# Altium PCB Grabber_DIOT.PCBDOC (part 4 of 7)
Units mm, origin at the board's own origin, x right, y up, seen from the top; angles counter-clockwise.
Board outline 221.14 x 100 mm, 4 copper layers (TopLayer, MidLayer1, Internal layer GND, Bottom Layer), stack 1.607 mm thick; 234 components, 170 nets, 1025 pads, 389 vias.
Unrouted connection lines stored in the file: 2.
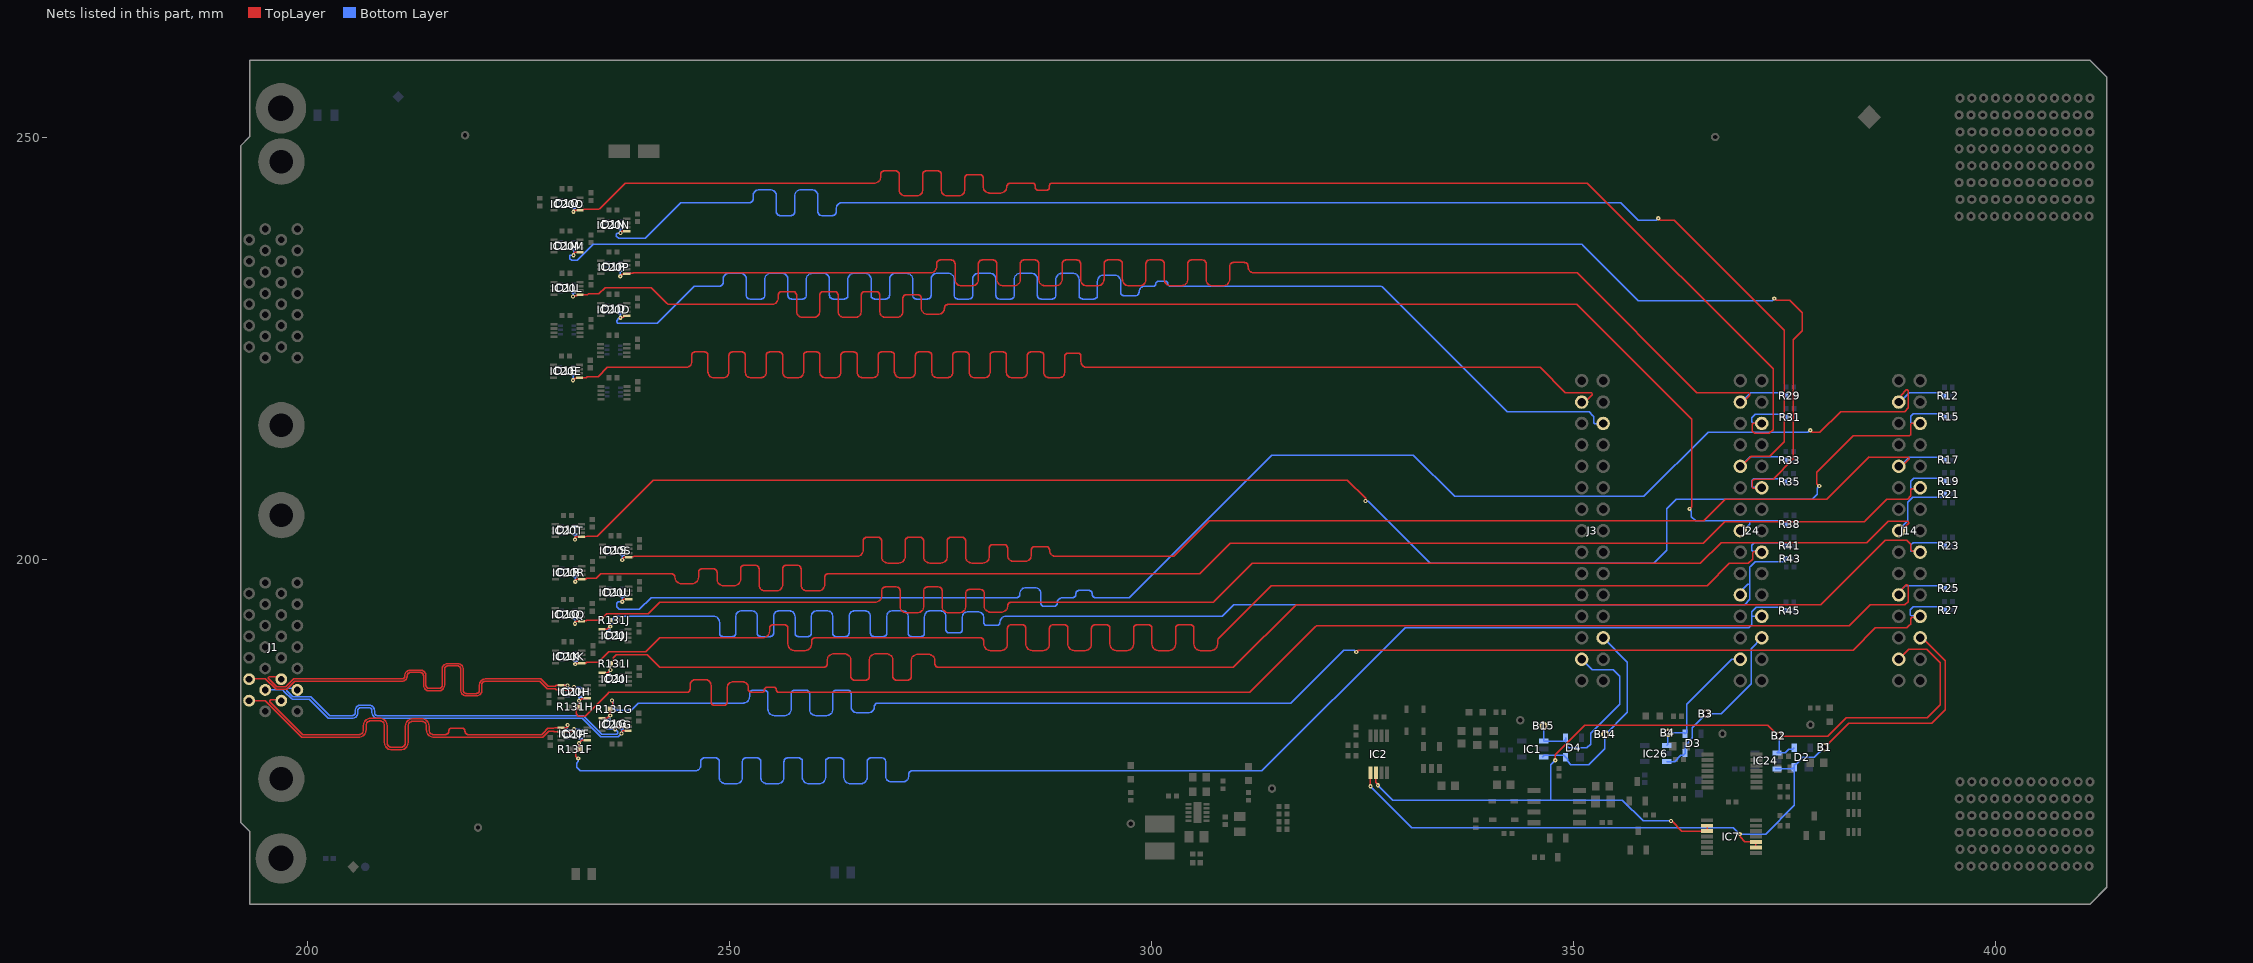
[diagram p5: the nets of this part, all layers, seen from the top]

## Via types
v1: diameter 0.5, hole 0.2, TopLayer to Bottom Layer, tented both sides, 374 vias
v2: diameter 0.8, hole 0.5, TopLayer to Bottom Layer, tented both sides, 15 vias

## Nets (pads, with @x,y where several pads share a name; then routed paths per layer and width w, separated by ;. In a path a pad name is that pad's centre, name@x,y a point inside that pad or via, vN(x,y) a via of type N, cw(c..) or ccw(c..) an arc to the next point about the centre after c; other vN are vias at no path point) (continued)
CC1_N: D1H.6 IC20H.5 J1.4 | length 47.6
  TopLayer w0.152: J1.4@196.921,185.946 196.446,185.946 196.27,186.123 195.487,186.123 195.398,186.034 195.398,185.907 196.414,184.891 197.442,184.891 198.226,185.675 198.39,185.839 207.9,185.839 211.181,185.839 ccw(c211.181,186.225) 211.567,186.225 cw(c212.232,186.225) 212.232,186.89 213.391,186.89 cw(c213.391,186.225) 214.056,186.225 214.056,185.096 ccw(c214.442,185.096) 214.442,184.71 215.601,184.71 ccw(c215.601,185.096) 215.987,185.096 215.987,187 cw(c216.652,187) 216.652,187.665 217.81,187.665 cw(c217.81,187) 218.476,187 218.476,184.499 ccw(c218.862,184.499) 218.862,184.113 220.02,184.113 ccw(c220.02,184.499) 220.406,184.499 220.406,185.173 cw(c221.072,185.173) 221.072,185.839 221.288,185.839 227.673,185.839 227.837,185.675 228.551,184.961 229.37,184.961 229.482,185.074 IC20H.5@230.074,185.074 ; IC20H.5@230.423,185.072 v1(230.834,185.071) v1(230.834,185.071)
  Bottom Layer w0.152: D1H.6@230.834,184.749 v1(230.834,185.071)
CC1_P: D1H.1 IC20H.6 J1.17 | length 50.1
  TopLayer w0.152: J1.17@193.111,185.809 193.194,185.893 195.017,185.893 196.298,184.612 197.558,184.612 198.505,185.559 207.9,185.559 211.181,185.559 ccw(c211.181,186.225) 211.846,186.225 cw(c212.232,186.225) 212.232,186.611 213.391,186.611 cw(c213.391,186.225) 213.777,186.225 213.777,185.096 ccw(c214.442,185.096) 214.442,184.431 215.601,184.431 ccw(c215.601,185.096) 216.266,185.096 216.266,187 cw(c216.652,187) 216.652,187.386 217.81,187.386 cw(c217.81,187) 218.196,187 218.196,184.499 ccw(c218.862,184.499) 218.862,183.834 220.02,183.834 ccw(c220.02,184.499) 220.686,184.499 220.686,185.173 cw(c221.072,185.173) 221.072,185.559 221.288,185.559 227.558,185.559 228.435,184.681 229.393,184.681 229.501,184.574 IC20H.6@230.074,184.574 ; IC20H.6@230.148,184.5 230.423,184.5 230.425,184.497 231.229,184.497 231.544,184.813 231.613,184.813 v1(231.613,184.882)
  Bottom Layer w0.152: v1(231.613,184.882) 232.281,184.882 D1H.1@232.414,184.749
CC2_N: D1G.6 IC20G.5 J1.16 | length 48
  TopLayer w0.152: v1(237.239,179.376) 237.239,179.589 237.341,179.692 IC20G.5@238.016,179.692
  Bottom Layer w0.152: J1.16@195.024,184.547 197.075,184.547 197.274,184.349 197.274,184.335 198.14,183.468 198.195,183.468 198.22,183.443 200.264,183.443 202.51,181.196 205.123,181.196 205.351,181.196 ccw(c205.351,181.836) 205.991,181.836 205.991,182.094 cw(c206.327,182.094) 206.327,182.429 207.332,182.429 cw(c207.332,182.094) 207.668,182.094 207.668,181.836 ccw(c208.308,181.836) 208.308,181.196 210.181,181.196 232.577,181.196 234.674,179.099 234.764,179.01 236.873,179.01 237.256,179.393 D1G.6@237.256,180.017
CC2_P: D1G.1 IC20G.6 J1.3 | length 47.7
  TopLayer w0.152: v1(236.477,179.884) 236.477,179.953 236.716,180.192 IC20G.6@238.016,180.192
  Bottom Layer w0.152: J1.3@198.826,184.676 198.771,184.732 197.643,184.732 197.553,184.643 197.553,184.451 198.256,183.748 200.39,183.748 202.637,181.501 205.123,181.501 205.351,181.501 ccw(c205.351,181.836) 205.686,181.836 205.686,182.094 cw(c206.327,182.094) 206.327,182.734 207.332,182.734 cw(c207.332,182.094) 207.972,182.094 207.972,181.836 ccw(c208.308,181.836) 208.308,181.501 210.181,181.501 232.703,181.501 234.89,179.315 236.678,179.315 236.768,179.404 236.768,179.593 v1(236.477,179.884) 235.809,179.884 D1G.1@235.676,180.017
CC3_N: D1F.6 IC20F.5 J1.2 | length 48.8
  TopLayer w0.152: J1.2@196.921,183.269 196.833,183.358 195.646,183.358 195.557,183.268 195.557,183.142 199.451,179.248 200.043,179.248 205.882,179.248 206.11,179.248 ccw(c206.11,179.795) 206.656,179.795 206.656,180.332 cw(c207.507,180.332) 207.507,181.183 208.599,181.183 cw(c208.599,180.332) 209.45,180.332 209.45,178.294 ccw(c209.996,178.294) 209.996,177.748 211.089,177.748 ccw(c211.089,178.294) 211.635,178.294 211.635,180.272 cw(c212.486,180.272) 212.486,181.123 213.578,181.123 cw(c213.578,180.272) 214.429,180.272 214.429,179.795 ccw(c214.975,179.795) 214.975,179.248 215.978,179.248 216.295,179.248 216.371,179.248 ccw(c216.371,179.635) 216.757,179.635 216.757,179.64 cw(c217.143,179.64) 217.143,180.027 218.302,180.027 cw(c218.302,179.64) 218.688,179.64 218.688,179.635 ccw(c219.074,179.635) 219.074,179.248 223.362,179.248 227.787,179.248 227.956,179.417 227.956,179.429 228.502,179.976 229.231,179.976 229.328,180.074 IC20F.5@230.074,180.074 230.749,180.074 230.851,180.176 v1(230.851,180.39)
  Bottom Layer w0.152: D1F.6@230.834,179.749 230.834,180.373 v1(230.851,180.39)
CC3_P: D1F.1 IC20F.6 J1.15 | length 49.8
  TopLayer w0.152: J1.15@193.116,183.264 195.004,183.264 195.252,183.016 199.324,178.944 205.882,178.944 206.11,178.944 ccw(c206.11,179.795) 206.961,179.795 206.961,180.332 cw(c207.507,180.332) 207.507,180.878 208.599,180.878 cw(c208.599,180.332) 209.145,180.332 209.145,178.294 ccw(c209.996,178.294) 209.996,177.443 211.089,177.443 ccw(c211.089,178.294) 211.939,178.294 211.939,180.272 cw(c212.486,180.272) 212.486,180.819 213.578,180.819 cw(c213.578,180.272) 214.124,180.272 214.124,179.795 ccw(c214.975,179.795) 214.975,178.944 215.978,178.944 227.384,178.944 227.913,178.944 228.26,179.291 228.26,179.303 228.628,179.671 229.197,179.671 229.295,179.574 IC20F.6@230.074,179.574 231.305,179.574 v1(231.613,179.882)
  Bottom Layer w0.152: v1(231.613,179.882) 232.281,179.882 D1F.1@232.414,179.749
EEM0_I2C.SCL: B2.1 D2.3 IC2.2 IC7.9 IC7.10 IC24.1 J14.27 | length 113.6
  TopLayer w0.152: IC2.2@326.632,174.707 326.632,173.576 326.857,173.351 v1(326.857,173.257) ; v1(347.873,176.207) 347.873,176.873 351.343,180.344 373.077,180.344 B2.1@374.31,179.111 ; v1(361.588,169.017) 361.664,169.017 362.873,167.807 IC7.10@365.857,167.807 IC7.9@365.857,168.457 ; B2.1@374.383,179.111 374.423,179.071 380.187,179.071 382.379,181.263 391.958,181.263 393.482,182.787 393.482,187.759 391.883,189.357 389.733,189.357 J14.27@388.575,188.199
  Bottom Layer w0.152: v1(326.857,173.257) 328.632,171.482 347.284,171.482 347.342,171.482 ; v1(347.873,176.207) 347.342,175.676 347.342,171.482 ; v1(361.588,169.017) 358.306,169.017 355.841,171.482 347.342,171.482 ; B2.1@374.383,179.111 374.417,179.077 374.417,177.307 374.194,177.083 IC24.1@374.143,177.083 375.13,177.083 375.542,177.495 375.992,177.495 D2.3@376.192,177.695
EEM0_I2C.SDA: B1.1 D2.2 IC2.1 IC7.2 IC7.3 IC24.3 J14.26 | length 96.3
  TopLayer w0.152: v1(325.982,173.132) IC2.1@325.982,174.707 ; v1(369.732,167.457) 369.768,167.421 369.768,167.121 370.343,166.547 371.618,166.547 IC7.3@371.657,166.507 IC7.2@371.657,165.857 ; B1.1@379.782,177.757 382.63,180.606 392.48,180.606 394.082,182.207 394.082,187.974 391.343,190.713 J14.26@391.115,190.713
  Bottom Layer w0.152: v1(325.982,173.132) 330.882,168.232 368.957,168.232 v1(369.732,167.457) 372.803,167.457 376.192,170.846 D2.2@376.192,175.395 ; IC24.3@373.916,175.182 375.979,175.182 D2.2@376.192,175.395 ; B1.1@379.782,177.757 378.57,176.545 377.187,176.545 376.461,175.819 376.416,175.819 376.192,175.595 D2.2@376.192,175.395
EEM1_I2C.SCL: B4.1 D3.3 IC26.1 J24.27 | length 15.7
  Bottom Layer w0.152: IC26.1@361.092,177.956 361.199,178.063 B4.1@361.199,179.444 363.179,179.444 D3.3@363.256,179.367 363.44,179.551 363.44,182.833 368.776,188.169 369.801,188.169 J24.27@369.805,188.172
EEM1_I2C.SDA: B3.1 D3.2 IC26.3 J24.26 | length 21.1
  Bottom Layer w0.152: IC26.3@361.092,176.056 362.005,176.056 362.741,176.792 363.032,176.792 363.256,177.016 363.256,177.98 364.123,178.847 364.123,180.067 365.721,181.666 B3.1@365.721,181.731 367.519,181.731 371.075,185.287 371.075,189.442 J24.26@372.345,190.712
EEM2_I2C.SCL: B15.1 D4.3 IC1.1 J3.27 | length 23.4
  Bottom Layer w0.152: B15.1@346.483,180.279 346.507,180.256 IC1.1@346.507,178.481 348.883,178.481 D4.3@349.107,178.705 ; D4.3@349.107,178.858 D4.3@349.107,178.705 ; J3.27@351.01,188.172 352.257,186.926 354.745,186.926 355.501,186.17 355.501,182.827 352.055,179.381 352.055,178.125 351.605,177.674 349.477,177.674 349.107,178.044 D4.3@349.107,178.705
EEM2_I2C.SDA: B14.1 D4.2 IC1.3 J3.26 | length 24.3
  Bottom Layer w0.152: IC1.3@346.341,176.581 346.548,176.788 348.883,176.788 349.107,176.564 D4.2@349.107,176.558 349.331,176.335 349.331,176.085 349.72,175.696 351.828,175.696 353.722,177.591 353.722,179.191 356.432,181.9 356.432,187.831 J3.26@353.55,190.712
EEM_IO.LVDS_N0: D1U.6 IC20U.5 J14.3 R12.1 | length 184.3
  TopLayer w0.152: v1(237.324,194.976) 237.324,195.189 237.426,195.292 IC20U.5@238.101,195.292 ; v1(378.077,215.31) 378.096,215.31 378.34,215.066 379.226,215.066 381.678,217.518 389.263,217.518 389.696,217.95 389.696,219.998 389.606,220.087 389.48,220.087 388.852,219.459 388.852,218.93 J14.3@388.575,218.653
  Bottom Layer w0.152: D1U.6@237.341,195.617 237.341,194.993 237.316,194.968 236.827,194.968 236.66,194.8 236.66,194.426 236.673,194.413 236.995,194.091 239.338,194.091 240.733,195.486 283.84,195.486 284.056,195.486 ccw(c284.056,195.872) 284.442,195.872 284.442,195.967 cw(c285.108,195.967) 285.108,196.632 286.266,196.632 cw(c286.266,195.967) 286.932,195.967 286.932,194.821 ccw(c287.318,194.821) 287.318,194.434 288.476,194.434 ccw(c288.476,194.821) 288.862,194.821 cw(c289.527,194.821) 289.527,195.486 290.515,195.486 290.609,195.486 290.686,195.486 ccw(c290.686,195.872) 291.072,195.872 291.072,195.944 cw(c291.458,195.944) 291.458,196.33 292.616,196.33 cw(c292.616,195.944) 293.002,195.944 293.002,195.872 ccw(c293.388,195.872) 293.388,195.486 294.435,195.486 297.392,195.486 314.259,212.354 331.069,212.354 335.954,207.468 358.368,207.468 365.976,215.076 377.814,215.076 378.049,215.31 v1(378.077,215.31) ; J14.3@388.573,218.655 388.707,218.655 389.832,219.78 393.608,219.78 393.744,219.644 393.764,219.644 393.978,219.43 R12.1@393.978,219.41
EEM_IO.LVDS_N1: D1T.6 IC20T.5 J14.6 R15.1 | length 185.5
  TopLayer w0.152: v1(231.714,202.35) 231.714,202.563 231.816,202.666 IC20T.5@232.491,202.666 232.992,202.666 233.09,202.763 234.353,202.763 241,209.41 323.236,209.41 325.4,207.246 v1@325.4,207.092 ; v1(379.147,208.701) 379.147,208.706 378.889,208.964 378.889,210.35 383.171,214.632 389.8,214.632 389.971,214.803 389.971,216.024 390.06,216.113 J14.6@391.115,216.113
  Bottom Layer w0.152: v1(231.714,202.35) 231.731,202.367 D1T.6@231.731,202.991 ; v1@325.518,206.956 325.518,206.936 325.552,206.901 325.744,206.901 332.949,199.696 333.113,199.533 359.554,199.533 361.092,201.071 361.092,203.287 361.092,206.015 362.24,207.163 378.354,207.163 378.436,207.245 378.618,207.426 378.75,207.558 378.914,207.722 378.914,208.438 379.147,208.671 v1(379.147,208.701) ; J14.6@391.107,216.121 390.088,216.121 389.999,216.21 389.999,216.426 389.999,216.949 390.31,217.26 393.638,217.26 393.769,217.129 393.789,217.129 394.005,216.913 R15.1@394.005,216.893
  other v1: 325.392,206.921
EEM_IO.LVDS_N2: D1S.6 IC20S.5 J14.9 R17.1 | length 185.6
  TopLayer w0.152: v1(237.324,199.942) 237.39,200.008 237.39,200.121 237.533,200.264 IC20S.5@238.094,200.264 ; IC20S.5@238.101,200.258 238.171,200.328 238.672,200.328 238.7,200.355 264.899,200.355 265.127,200.355 ccw(c265.127,201.097) 265.869,201.097 265.869,202.187 cw(c266.306,202.187) 266.306,202.624 267.617,202.624 cw(c267.617,202.187) 268.053,202.187 268.053,200.317 ccw(c268.795,200.317) 268.795,199.576 270.106,199.576 ccw(c270.106,200.317) 270.847,200.317 270.847,202.187 cw(c271.284,202.187) 271.284,202.624 272.595,202.624 cw(c272.595,202.187) 273.032,202.187 273.032,200.317 ccw(c273.774,200.317) 273.774,199.576 275.084,199.576 ccw(c275.084,200.317) 275.826,200.317 275.826,202.187 cw(c276.263,202.187) 276.263,202.624 277.573,202.624 cw(c277.573,202.187) 278.01,202.187 278.01,200.317 ccw(c278.752,200.317) 278.752,199.576 280.063,199.576 ccw(c280.063,200.317) 280.804,200.317 280.804,201.328 cw(c281.241,201.328) 281.241,201.765 282.552,201.765 cw(c282.552,201.328) 282.989,201.328 282.989,200.508 ccw(c283.73,200.508) 283.73,199.766 285.041,199.766 ccw(c285.041,200.508) 285.783,200.508 285.783,201.097 cw(c286.22,201.097) 286.22,201.534 287.53,201.534 cw(c287.53,201.097) 287.967,201.097 ccw(c288.709,201.097) 288.709,200.355 291.732,200.355 302.53,200.355 302.656,200.355 306.871,204.57 365.461,204.57 368.046,207.155 380.07,207.155 380.248,207.334 385.064,212.149 385.077,212.137 389.712,212.137 389.801,212.048 389.801,211.921 388.913,211.033 J14.9@388.575,211.033
  Bottom Layer w0.152: v1(237.324,199.942) 237.341,199.959 D1S.6@237.341,200.583 ; J14.9@388.575,211.033 388.734,211.033 389.828,212.127 393.667,212.127 393.771,212.023 393.791,212.023 394.005,211.809 R17.1@394.005,211.789
EEM_IO.LVDS_N3: D1R.6 IC20R.5 J14.12 R19.1 | length 185.7
  TopLayer w0.152: v1(231.749,197.359) 231.749,197.572 231.851,197.675 IC20R.5@232.526,197.675 233.027,197.675 233.125,197.772 234.222,197.772 234.767,198.317 240.976,198.317 243.135,198.317 cw(c243.135,197.88) 243.572,197.88 ccw(c244.314,197.88) 244.314,197.138 245.624,197.138 ccw(c245.624,197.88) 246.366,197.88 246.366,198.469 cw(c246.803,198.469) 246.803,198.906 248.113,198.906 cw(c248.113,198.469) 248.55,198.469 248.55,197.635 ccw(c249.292,197.635) 249.292,196.894 250.603,196.894 ccw(c250.603,197.635) 251.344,197.635 251.344,198.879 cw(c251.781,198.879) 251.781,199.316 253.092,199.316 cw(c253.092,198.879) 253.529,198.879 253.529,197.009 ccw(c254.27,197.009) 254.27,196.268 255.581,196.268 ccw(c255.581,197.009) 256.323,197.009 256.323,198.879 cw(c256.76,198.879) 256.76,199.316 258.07,199.316 cw(c258.07,198.879) 258.507,198.879 258.507,197.009 ccw(c259.249,197.009) 259.249,196.268 260.559,196.268 ccw(c260.559,197.009) 261.301,197.009 261.301,197.88 cw(c261.738,197.88) 261.738,198.317 261.967,198.317 305.746,198.317 309.37,201.94 365.394,201.94 367.944,204.49 384.529,204.49 384.618,204.58 387.164,207.125 389.615,207.125 390.023,207.534 390.023,208.243 390.137,208.357 J14.12@390.709,208.357
  Bottom Layer w0.152: v1(231.749,197.359) 231.766,197.376 D1R.6@231.766,198 ; J14.12@391.282,208.357 390.137,208.357 389.971,208.523 389.971,208.838 389.971,209.246 390.358,209.633 393.637,209.633 393.771,209.499 393.791,209.499 394.005,209.285 R19.1@394.005,209.265
EEM_IO.LVDS_N4: D1Q.6 IC20Q.5 J14.15 R21.1 | length 188.2
  TopLayer w0.152: v1(231.714,192.376) 231.714,192.589 231.816,192.692 IC20Q.5@232.491,192.692 232.54,192.741 233.041,192.741 233.089,192.789 234.73,192.789 235.506,193.565 240.417,193.565 240.596,193.743 241.79,194.937 267.097,194.937 267.326,194.937 ccw(c267.326,195.679) 268.068,195.679 268.068,196.304 cw(c268.504,196.304) 268.504,196.741 269.815,196.741 cw(c269.815,196.304) 270.252,196.304 270.252,194.434 ccw(c270.994,194.434) 270.994,193.693 272.304,193.693 ccw(c272.304,194.434) 273.046,194.434 273.046,196.304 cw(c273.483,196.304) 273.483,196.741 274.793,196.741 cw(c274.793,196.304) 275.23,196.304 275.23,194.434 ccw(c275.972,194.434) 275.972,193.693 277.283,193.693 ccw(c277.283,194.434) 278.024,194.434 278.024,196.007 cw(c278.461,196.007) 278.461,196.444 279.772,196.444 cw(c279.772,196.007) 280.209,196.007 280.209,194.5 ccw(c280.95,194.5) 280.95,193.759 282.261,193.759 ccw(c282.261,194.5) 283.003,194.5 cw(c283.44,194.5) 283.44,194.937 285.204,194.937 307.393,194.937 307.482,195.027 311.988,199.533 365.084,199.533 367.536,201.985 384.794,201.985 387.333,204.524 389.673,204.524 389.763,204.435 389.763,204.309 388.867,203.413 J14.15@388.575,203.413
  Bottom Layer w0.152: v1(231.714,192.376) 231.731,192.393 D1Q.6@231.731,193.017 ; J14.15@388.575,203.413 388.575,203.498 389.664,204.587 389.664,206.795 390.238,207.37 393.683,207.37 393.796,207.483 393.809,207.483 394.005,207.679 R21.1@394.005,207.692
EEM_IO.LVDS_N5: D1I.3 IC20I.1 J14.18 R23.1 R131I.1 | length 184.2
  TopLayer w0.152: IC20I.1@234.951,186.585 235.601,186.585 v1(235.926,186.91) 235.926,187.655 236.14,187.868 236.154,187.868 236.244,187.958 236.244,188.365 236.615,188.736 240.256,188.736 240.345,188.647 240.533,188.46 241.769,187.223 260.947,187.223 261.176,187.223 ccw(c261.176,187.66) 261.613,187.66 261.613,188.067 cw(c262.355,188.067) 262.355,188.809 263.665,188.809 cw(c263.665,188.067) 264.407,188.067 264.407,186.136 ccw(c264.844,186.136) 264.844,185.699 266.154,185.699 ccw(c266.154,186.136) 266.591,186.136 266.591,188.067 cw(c267.333,188.067) 267.333,188.809 268.644,188.809 cw(c268.644,188.067) 269.385,188.067 269.385,186.136 ccw(c269.822,186.136) 269.822,185.699 271.133,185.699 ccw(c271.133,186.136) 271.57,186.136 271.57,188.008 cw(c272.311,188.008) 272.311,188.75 273.622,188.75 cw(c273.622,188.008) 274.364,188.008 274.364,187.66 ccw(c274.801,187.66) 274.801,187.223 276.231,187.223 309.748,187.223 317.18,194.655 379.362,194.655 386.967,202.26 389.539,202.26 389.909,201.891 389.998,201.801 389.998,201.131 390.175,200.954 391.034,200.954 J14.18@391.115,200.873
  Bottom Layer w0.152: D1I.3@235.711,186.41 235.711,186.695 v1(235.926,186.91) ; J14.18@390.516,200.803 390.516,200.876 390.446,200.946 390.086,200.946 389.997,201.036 389.997,201.722 390.272,201.997 393.641,201.997 393.771,201.867 393.791,201.867 394.005,201.653 R23.1@394.005,201.633
EEM_IO.LVDS_N6: D1H.3 IC20H.1 J14.21 R25.1 R131H.1 | length 184.5
  TopLayer w0.152: IC20H.1@233.174,183.574 233.1,183.5 232.544,183.5 232.293,183.249 v1(232.199,183.249) 232.199,182.504 231.845,182.149 231.845,181.71 232.114,181.441 232.931,181.441 235.575,184.085 235.739,184.249 244.751,184.249 244.967,184.249 ccw(c244.967,184.635) 245.353,184.635 245.353,185.107 cw(c246.018,185.107) 246.018,185.773 247.177,185.773 cw(c247.177,185.107) 247.842,185.107 247.842,183.111 ccw(c248.228,183.111) 248.228,182.725 249.386,182.725 ccw(c249.386,183.111) 249.772,183.111 249.772,184.827 cw(c250.438,184.827) 250.438,185.492 251.596,185.492 cw(c251.596,184.827) 252.262,184.827 252.262,184.635 ccw(c252.648,184.635) 252.648,184.249 253.709,184.249 253.813,184.249 253.889,184.249 ccw(c253.889,184.533) 254.173,184.533 254.173,184.564 cw(c254.458,184.564) 254.458,184.849 255.311,184.849 cw(c255.311,184.564) 255.596,184.564 255.596,184.533 ccw(c255.88,184.533) 255.88,184.249 256.387,184.249 311.691,184.249 319.442,192 319.606,192.164 382.725,192.164 385.191,194.63 389.312,194.63 389.689,195.007 389.689,196.939 389.599,197.029 389.473,197.029 J14.21@388.575,196.13 ; J14.21@388.575,195.819 J14.21@388.778,195.615
  Bottom Layer w0.152: v1(232.199,183.249) 232.207,183.256 232.207,183.675 232.28,183.748 D1H.3@232.414,183.749 ; J14.21@388.575,195.793 388.575,196.103 389.359,196.887 393.676,196.887 393.769,196.794 393.789,196.794 394.003,196.58 R25.1@394.003,196.56
EEM_IO.LVDS_N7: D1G.3 IC20G.1 J14.24 R27.1 R131G.1 | length 185
  TopLayer w0.152: IC20G.1@234.916,181.192 235.566,181.192 v1(235.891,181.517) 235.891,182.262 236.227,182.597 236.227,183.07 236.111,183.186 v1(236.111,183.28) ; v1@236.105,183.273 v1(236.111,183.28) ; v1@236.178,183.346 v1(236.111,183.28) ; v1(324.286,189.031) 324.515,189.26 383.182,189.26 385.819,191.898 389.545,191.898 389.596,191.949 389.83,192.182 389.993,192.346 389.993,193 390.124,193.131 390.992,193.131 J14.24@391.115,193.253
  Bottom Layer w0.152: D1G.3@235.676,181.017 235.676,181.302 v1(235.891,181.517) ; v1(236.111,183.28) 236.111,183.186 236.241,183.056 236.241,183.037 236.262,183.016 236.262,182.448 236.594,182.116 238.376,182.116 238.458,182.198 239.248,182.989 251.474,182.989 251.69,182.989 ccw(c251.69,183.705) 252.407,183.705 252.407,184.076 cw(c252.843,184.076) 252.843,184.513 254.154,184.513 cw(c254.154,184.076) 254.591,184.076 254.591,182.219 ccw(c255.307,182.219) 255.307,181.503 256.618,181.503 ccw(c256.618,182.219) 257.334,182.219 257.334,184.076 cw(c257.771,184.076) 257.771,184.513 259.082,184.513 cw(c259.082,184.076) 259.519,184.076 259.519,182.219 ccw(c260.235,182.219) 260.235,181.503 261.545,181.503 ccw(c261.545,182.219) 262.262,182.219 262.262,184.074 cw(c262.699,184.074) 262.699,184.511 264.009,184.511 cw(c264.009,184.074) 264.446,184.074 264.446,182.552 ccw(c265.162,182.552) 265.162,181.835 266.473,181.835 ccw(c266.473,182.552) 267.189,182.552 cw(c267.626,182.552) 267.626,182.989 268.936,182.989 316.526,182.989 322.798,189.26 324.056,189.26 v1(324.286,189.031) ; J14.24@391.115,193.253 391.06,193.308 390.042,193.308 389.952,193.397 389.952,194.056 390.282,194.386 393.627,194.386 393.769,194.244 393.789,194.244 394.003,194.03 R27.1@394.003,194.01
EEM_IO.LVDS_N8: D1P.6 IC20P.5 J24.3 R29.1 | length 185.3
  TopLayer w0.152: v1(237.089,233.565) 237.124,233.565 237.352,233.793 237.792,233.793 237.887,233.887 238.581,233.887 238.653,233.96 273.613,233.96 273.837,233.96 ccw(c273.837,234.692) 274.569,234.692 274.569,235.047 cw(c275.006,235.047) 275.006,235.484 276.317,235.484 cw(c276.317,235.047) 276.753,235.047 276.753,233.168 ccw(c277.486,233.168) 277.486,232.436 278.797,232.436 ccw(c278.797,233.168) 279.529,233.168 279.529,235.047 cw(c279.966,235.047) 279.966,235.484 281.277,235.484 cw(c281.277,235.047) 281.713,235.047 281.713,233.168 ccw(c282.446,233.168) 282.446,232.436 283.757,232.436 ccw(c283.757,233.168) 284.489,233.168 284.489,235.047 cw(c284.926,235.047) 284.926,235.484 286.237,235.484 cw(c286.237,235.047) 286.673,235.047 286.673,233.168 ccw(c287.406,233.168) 287.406,232.436 288.717,232.436 ccw(c288.717,233.168) 289.449,233.168 289.449,235.047 cw(c289.886,235.047) 289.886,235.484 291.197,235.484 cw(c291.197,235.047) 291.633,235.047 291.633,233.168 ccw(c292.366,233.168) 292.366,232.436 293.677,232.436 ccw(c293.677,233.168) 294.409,233.168 294.409,235.047 cw(c294.846,235.047) 294.846,235.484 296.157,235.484 cw(c296.157,235.047) 296.593,235.047 296.593,233.168 ccw(c297.326,233.168) 297.326,232.436 298.637,232.436 ccw(c298.637,233.168) 299.369,233.168 299.369,235.047 cw(c299.806,235.047) 299.806,235.484 301.117,235.484 cw(c301.117,235.047) 301.553,235.047 301.553,233.168 ccw(c302.286,233.168) 302.286,232.436 303.597,232.436 ccw(c303.597,233.168) 304.329,233.168 304.329,235.047 cw(c304.766,235.047) 304.766,235.484 306.077,235.484 cw(c306.077,235.047) 306.513,235.047 306.513,233.168 ccw(c307.246,233.168) 307.246,232.436 308.557,232.436 ccw(c308.557,233.168) 309.289,233.168 309.289,234.752 cw(c309.726,234.752) 309.726,235.189 311.037,235.189 cw(c311.037,234.752) 311.473,234.752 311.473,234.692 ccw(c312.206,234.692) 312.206,233.96 314.696,233.96 350.456,233.96 364.659,219.757 370.818,219.757 370.907,219.668 370.907,219.457 370.103,218.652 J24.3@369.805,218.652
  Bottom Layer w0.152: v1@237.103,233.565 237.106,233.568 D1P.6@237.106,234.192 ; J24.3@369.805,218.652 369.937,218.652 371.057,219.773 374.845,219.773 374.964,219.654 374.984,219.654 375.198,219.44 R29.1@375.198,219.42
EEM_IO.LVDS_N9: D1O.6 IC20O.5 J24.6 R31.1 | length 185.4
  TopLayer w0.152: v1(231.531,241.192) 231.531,241.241 231.656,241.367 IC20O.5@232.331,241.367 232.405,241.44 232.742,241.44 232.769,241.467 234.54,241.467 234.63,241.556 237.667,244.594 266.983,244.594 267.212,244.594 ccw(c267.212,245.335) 267.953,245.335 267.953,245.608 cw(c268.39,245.608) 268.39,246.045 269.701,246.045 cw(c269.701,245.608) 270.138,245.608 270.138,243.811 ccw(c270.88,243.811) 270.88,243.07 272.19,243.07 ccw(c272.19,243.811) 272.932,243.811 272.932,245.608 cw(c273.369,245.608) 273.369,246.045 274.679,246.045 cw(c274.679,245.608) 275.116,245.608 275.116,243.811 ccw(c275.858,243.811) 275.858,243.07 277.169,243.07 ccw(c277.169,243.811) 277.91,243.811 277.91,245.166 cw(c278.347,245.166) 278.347,245.603 279.658,245.603 cw(c279.658,245.166) 280.095,245.166 280.095,244.157 ccw(c280.836,244.157) 280.836,243.415 282.147,243.415 ccw(c282.147,244.157) 282.889,244.157 cw(c283.326,244.157) 283.326,244.594 284.171,244.594 284.177,244.594 285.929,244.594 cw(c285.929,244.258) 286.265,244.258 286.265,244.081 ccw(c286.6,244.081) 286.6,243.746 287.606,243.746 ccw(c287.606,244.081) 287.941,244.081 287.941,244.258 cw(c288.276,244.258) 288.276,244.594 290.545,244.594 351.673,244.594 373.69,222.577 373.69,215.377 373.25,214.937 371.489,214.937 371.237,215.189 371.237,216.023 371.326,216.112 J24.6@372.345,216.112
  Bottom Layer w0.152: v1(231.531,241.192) 231.531,241.108 231.571,241.068 D1O.6@231.571,241.692 ; J24.6@372.345,216.112 371.328,216.112 371.147,216.293 371.147,216.785 371.564,217.202 374.894,217.202 374.986,217.11 375.006,217.11 375.22,216.897 R31.1@375.22,216.877
EEM_IO.LVDS_N10: D1N.6 IC20N.5 J24.9 R33.1 | length 184.1
  TopLayer w0.152: v1(237.116,238.69) 237.116,238.791 237.191,238.867 IC20N.5@237.866,238.867 ; v1(360.081,240.434) 360.123,240.434 360.344,240.213 361.982,240.213 375.012,227.182 375.012,213.956 373.287,212.231 371.102,212.231 369.904,211.032 J24.9@369.805,211.032
  Bottom Layer w0.152: D1N.6@237.106,239.192 237.106,238.773 v1@237.116,238.763 ; v1(237.116,238.69) 237.105,238.679 236.754,238.679 236.637,238.562 236.637,238.301 236.904,238.034 240.024,238.034 241.333,239.343 244.186,242.196 244.268,242.278 252.18,242.278 252.396,242.278 ccw(c252.396,242.715) 252.833,242.715 252.833,243.086 cw(c253.549,243.086) 253.549,243.802 254.86,243.802 cw(c254.86,243.086) 255.576,243.086 255.576,241.191 ccw(c256.013,241.191) 256.013,240.754 257.324,240.754 ccw(c257.324,241.191) 257.76,241.191 257.76,243.086 cw(c258.477,243.086) 258.477,243.802 259.787,243.802 cw(c259.787,243.086) 260.504,243.086 260.504,241.191 ccw(c260.941,241.191) 260.941,240.754 262.251,240.754 ccw(c262.251,241.191) 262.688,241.191 262.688,241.562 cw(c263.404,241.562) 263.404,242.278 264.907,242.278 355.665,242.278 357.732,240.21 359.817,240.21 359.947,240.34 360.037,240.34 v1@360.04,240.337 ; J24.9@369.805,211.032 370.959,212.187 374.789,212.187 374.953,212.023 374.973,212.023 375.187,211.809 R33.1@375.187,211.789
EEM_IO.LVDS_N11: D1M.6 IC20M.5 J24.12 R35.1 | length 184.8
  TopLayer w0.152: v1(231.554,236.058) 231.554,236.271 231.656,236.374 IC20M.5@232.331,236.374 ; J24.12@372.345,208.492 372.295,208.443 371.305,208.443 371.216,208.532 371.216,208.918 371.216,209.303 371.439,209.526 373.681,209.526 376.061,211.907 376.061,226.014 377.145,227.098 377.145,229.235 375.689,230.691 374.041,230.691 v1(373.824,230.909)
  Bottom Layer w0.152: v1(231.554,236.058) 231.55,236.062 231.178,236.062 231.089,235.972 231.089,235.655 231.319,235.424 231.973,235.424 233.876,237.328 351.048,237.328 351.13,237.246 351.256,237.12 357.714,230.661 373.561,230.661 373.808,230.909 v1(373.824,230.909) ; v1@231.571,236.075 D1M.6@231.571,236.699 ; J24.12@372.345,208.492 372.255,208.582 371.257,208.582 371.152,208.687 371.152,209.332 371.392,209.572 374.818,209.572 374.94,209.45 374.96,209.45 375.174,209.236 R35.1@375.174,209.216
EEM_IO.LVDS_N12: D1L.6 IC20L.5 J24.15 R38.1 | length 183.5
  TopLayer w0.152: v1(231.493,231.158) 231.559,231.225 231.914,231.225 231.982,231.293 232.257,231.293 IC20L.5@232.331,231.367 ; IC20L.5@232.552,231.39 233.246,231.39 233.318,231.462 234.548,231.462 235.3,232.214 240.766,232.214 242.601,230.379 242.765,230.215 254.86,230.215 255.076,230.215 ccw(c255.076,230.932) 255.792,230.932 255.792,231.303 cw(c256.229,231.303) 256.229,231.739 257.539,231.739 cw(c257.539,231.303) 257.976,231.303 257.976,229.408 ccw(c258.693,229.408) 258.693,228.691 260.003,228.691 ccw(c260.003,229.408) 260.72,229.408 260.72,231.303 cw(c261.156,231.303) 261.156,231.739 262.467,231.739 cw(c262.467,231.303) 262.904,231.303 262.904,229.408 ccw(c263.62,229.408) 263.62,228.691 264.931,228.691 ccw(c264.931,229.408) 265.647,229.408 265.647,231.303 cw(c266.084,231.303) 266.084,231.739 267.395,231.739 cw(c267.395,231.303) 267.832,231.303 267.832,229.408 ccw(c268.548,229.408) 268.548,228.691 269.858,228.691 ccw(c269.858,229.408) 270.575,229.408 270.575,230.929 cw(c271.012,230.929) 271.012,231.366 272.322,231.366 cw(c272.322,230.929) 272.759,230.929 272.759,229.779 ccw(c273.475,229.779) 273.475,229.062 274.786,229.062 ccw(c274.786,229.779) 275.502,229.779 cw(c275.939,229.779) 275.939,230.215 278.347,230.215 350.449,230.215 364.032,216.632 364.032,206.254 363.794,206.016 v1(363.794,205.991)
  Bottom Layer w0.152: v1@231.426,231.092 v1(231.493,231.158) 231.493,231.618 231.567,231.692 D1L.6@231.571,231.692 ; v1(363.794,205.991) 363.794,205.939 364.005,205.728 364.005,205.085 364.522,204.567 374.825,204.567 374.998,204.394 374.998,204.371 R38.1@375.212,204.157 ; J24.15@369.805,203.412 370.159,203.412 370.942,204.195 370.942,204.552
EEM_IO.LVDS_N13: D1K.6 IC20K.5 J24.18 R41.1 | length 185.7
  TopLayer w0.152: v1(231.754,187.596) 231.851,187.693 IC20K.5@232.526,187.693 233.027,187.693 233.125,187.79 234.502,187.79 235.751,189.04 240.086,189.04 241.78,190.734 248.434,190.734 254.03,190.734 ccw(c254.03,191.475) 254.771,191.475 254.771,191.821 cw(c255.208,191.821) 255.208,192.258 256.519,192.258 cw(c256.519,191.821) 256.956,191.821 256.956,189.951 ccw(c257.697,189.951) 257.697,189.21 259.008,189.21 ccw(c259.008,189.951) 259.75,189.951 259.75,190.297 cw(c260.187,190.297) 260.187,190.734 260.415,190.734 278.739,190.734 279.735,190.734 cw(c279.735,190.297) 280.172,190.297 280.172,189.951 ccw(c280.914,189.951) 280.914,189.21 282.225,189.21 ccw(c282.225,189.951) 282.966,189.951 282.966,191.821 cw(c283.403,191.821) 283.403,192.258 284.714,192.258 cw(c284.714,191.821) 285.151,191.821 285.151,189.951 ccw(c285.892,189.951) 285.892,189.21 287.203,189.21 ccw(c287.203,189.951) 287.945,189.951 287.945,191.821 cw(c288.382,191.821) 288.382,192.258 289.692,192.258 cw(c289.692,191.821) 290.129,191.821 290.129,189.951 ccw(c290.871,189.951) 290.871,189.21 292.181,189.21 ccw(c292.181,189.951) 292.923,189.951 292.923,191.821 cw(c293.36,191.821) 293.36,192.258 294.671,192.258 cw(c294.671,191.821) 295.108,191.821 295.108,189.951 ccw(c295.849,189.951) 295.849,189.21 297.16,189.21 ccw(c297.16,189.951) 297.902,189.951 297.902,191.821 cw(c298.338,191.821) 298.338,192.258 299.649,192.258 cw(c299.649,191.821) 300.086,191.821 300.086,189.951 ccw(c300.828,189.951) 300.828,189.21 302.138,189.21 ccw(c302.138,189.951) 302.88,189.951 302.88,191.821 cw(c303.317,191.821) 303.317,192.258 304.627,192.258 cw(c304.627,191.821) 305.064,191.821 305.064,189.951 ccw(c305.806,189.951) 305.806,189.21 307.117,189.21 ccw(c307.117,189.951) 307.858,189.951 307.858,190.188 cw(c308.712,190.188) 308.108,190.791 ; 308.109,190.792 308.229,190.912 314.227,196.91 365.868,196.91 368.491,199.533 370.767,199.533 371.255,200.02 371.255,200.819 371.344,200.909 372.308,200.909 J24.18@372.345,200.872
  Bottom Layer w0.152: v1(231.754,187.596) 231.754,187.405 231.766,187.394 D1K.6@231.766,188.018 ; J24.18@372.345,200.872 372.234,200.983 371.255,200.983 371.165,201.072 371.165,201.68 371.47,201.985 374.881,201.985 375.006,201.859 375.006,201.833 R41.1@375.22,201.619
EEM_IO.LVDS_N14: D1J.3 IC20J.1 J24.21 R43.1 R131J.1 | length 186.2
  TopLayer w0.152: IC20J.1@234.923,191.718 235.573,191.718 v1(235.898,192.043) R131J.1@235.898,192.768
  Bottom Layer w0.152: D1J.3@235.683,191.543 235.683,191.828 v1(235.898,192.043) 235.898,192.114 236.09,192.306 236.09,192.857 236.242,193.009 236.493,193.26 245.698,193.26 248.162,193.26 cw(c248.162,192.569) 248.853,192.569 248.853,191.256 ccw(c249.239,191.256) 249.239,190.87 250.397,190.87 ccw(c250.397,191.256) 250.783,191.256 250.783,193.227 cw(c251.474,193.227) 251.474,193.918 252.633,193.918 cw(c252.633,193.227) 253.323,193.227 253.323,191.256 ccw(c253.71,191.256) 253.71,190.87 254.868,190.87 ccw(c254.868,191.256) 255.254,191.256 255.254,193.227 cw(c255.945,193.227) 255.945,193.918 257.103,193.918 cw(c257.103,193.227) 257.794,193.227 257.794,191.256 ccw(c258.18,191.256) 258.18,190.87 259.338,190.87 ccw(c259.338,191.256) 259.724,191.256 259.724,193.227 cw(c260.415,193.227) 260.415,193.918 261.573,193.918 cw(c261.573,193.227) 262.264,193.227 262.264,191.256 ccw(c262.65,191.256) 262.65,190.87 263.809,190.87 ccw(c263.809,191.256) 264.195,191.256 264.195,193.227 cw(c264.886,193.227) 264.886,193.918 266.044,193.918 cw(c266.044,193.227) 266.735,193.227 266.735,191.256 ccw(c267.121,191.256) 267.121,190.87 268.279,190.87 ccw(c268.279,191.256) 268.665,191.256 268.665,193.227 cw(c269.356,193.227) 269.356,193.918 270.514,193.918 cw(c270.514,193.227) 271.205,193.227 271.205,191.256 ccw(c271.591,191.256) 271.591,190.87 272.749,190.87 ccw(c272.749,191.256) 273.135,191.256 273.135,193.227 cw(c273.826,193.227) 273.826,193.918 274.985,193.918 cw(c274.985,193.227) 275.675,193.227 275.675,191.674 ccw(c276.062,191.674) 276.062,191.288 277.22,191.288 ccw(c277.22,191.674) 277.606,191.674 277.606,193.108 cw(c278.297,193.108) 278.297,193.799 279.455,193.799 cw(c279.455,193.108) 280.146,193.108 280.146,192.569 ccw(c280.532,192.569) 280.532,192.183 281.69,192.183 ccw(c281.69,192.569) 282.076,192.569 cw(c282.767,192.569) 282.767,193.26 284.798,193.26 308.401,193.26 309.618,194.477 309.797,194.655 370.313,194.655 370.93,195.272 370.93,197.064 ; J24.21@369.805,195.792 369.805,196.184 370.684,197.064 370.944,197.064 370.944,199.122 371.013,199.191 371.013,199.205 371.566,199.757 371.814,199.757 371.822,199.749 374.91,199.749 375.031,199.87 375.031,199.943 R43.1@375.112,200.024 ; R43.1@375.031,200.339 375.245,200.125 R43.1@375.245,200.105
EEM_IO.LVDS_N15: D1F.3 IC20F.1 J24.24 R45.1 R131F.1 | length 183.7
  TopLayer w0.152: v1(232.111,176.431) 232.098,176.431 231.828,176.702 231.828,177.132 232.199,177.504 R131F.1@232.199,177.524 v1(232.199,178.209) 232.199,178.249 232.524,178.574 IC20F.1@233.174,178.574
  Bottom Layer w0.152: v1(232.111,176.431) 232.101,176.421 232.101,176.069 231.911,175.879 231.911,175.365 232.318,174.958 245.698,174.958 245.914,174.958 ccw(c245.914,175.674) 246.631,175.674 246.631,176.045 cw(c247.067,176.045) 247.067,176.482 248.378,176.482 cw(c248.378,176.045) 248.815,176.045 248.815,174.15 ccw(c249.531,174.15) 249.531,173.434 250.842,173.434 ccw(c250.842,174.15) 251.558,174.15 251.558,176.045 cw(c251.995,176.045) 251.995,176.482 253.306,176.482 cw(c253.306,176.045) 253.743,176.045 253.743,174.15 ccw(c254.459,174.15) 254.459,173.434 255.769,173.434 ccw(c255.769,174.15) 256.486,174.15 256.486,176.045 cw(c256.923,176.045) 256.923,176.482 258.233,176.482 cw(c258.233,176.045) 258.67,176.045 258.67,174.15 ccw(c259.386,174.15) 259.386,173.434 260.697,173.434 ccw(c260.697,174.15) 261.413,174.15 261.413,176.045 cw(c261.85,176.045) 261.85,176.482 263.161,176.482 cw(c263.161,176.045) 263.598,176.045 263.598,174.15 ccw(c264.314,174.15) 264.314,173.434 265.625,173.434 ccw(c265.625,174.15) 266.341,174.15 266.341,176.045 cw(c266.778,176.045) 266.778,176.482 268.088,176.482 cw(c268.088,176.045) 268.525,176.045 268.525,174.347 ccw(c269.242,174.347) 269.242,173.63 270.552,173.63 ccw(c270.552,174.347) 271.269,174.347 271.269,174.521 cw(c271.705,174.521) 271.705,174.958 275.675,174.958 313.116,174.958 330.084,191.926 370.796,191.926 371.081,192.211 371.163,192.293 371.163,193.241 ; v1(232.199,178.209) 232.199,178.244 232.414,178.459 D1F.3@232.414,178.749 ; J24.24@372.103,193.494 J24.24@372.345,193.252 372.334,193.241 371.163,193.241 ; R45.1@375.199,193.957 375.199,193.977 374.859,194.317 371.698,194.317 371.163,193.782 371.163,193.241
EEM_IO.LVDS_N16: D1E.6 IC20E.5 J3.3 | length 179.5
  TopLayer w0.152: v1(231.489,221.226) 231.51,221.226 231.752,221.468 232.192,221.468 IC20E.5@232.266,221.542 233.076,221.542 233.174,221.639 234.457,221.639 235.566,222.748 244.669,222.748 244.885,222.748 ccw(c244.885,223.414) 245.551,223.414 245.551,224.197 cw(c245.937,224.197) 245.937,224.583 247.095,224.583 cw(c247.095,224.197) 247.481,224.197 247.481,222.2 ccw(c248.147,222.2) 248.147,221.535 249.305,221.535 ccw(c249.305,222.2) 249.97,222.2 249.97,224.197 cw(c250.356,224.197) 250.356,224.583 251.515,224.583 cw(c251.515,224.197) 251.901,224.197 251.901,222.2 ccw(c252.566,222.2) 252.566,221.535 253.724,221.535 ccw(c253.724,222.2) 254.39,222.2 254.39,224.197 cw(c254.776,224.197) 254.776,224.583 255.934,224.583 cw(c255.934,224.197) 256.32,224.197 256.32,222.2 ccw(c256.986,222.2) 256.986,221.535 258.144,221.535 ccw(c258.144,222.2) 258.809,222.2 258.809,224.197 cw(c259.196,224.197) 259.196,224.583 260.354,224.583 cw(c260.354,224.197) 260.74,224.197 260.74,222.2 ccw(c261.405,222.2) 261.405,221.535 262.564,221.535 ccw(c262.564,222.2) 263.229,222.2 263.229,224.197 cw(c263.615,224.197) 263.615,224.583 264.773,224.583 cw(c264.773,224.197) 265.159,224.197 265.159,222.2 ccw(c265.825,222.2) 265.825,221.535 266.983,221.535 ccw(c266.983,222.2) 267.649,222.2 267.649,224.197 cw(c268.035,224.197) 268.035,224.583 269.193,224.583 cw(c269.193,224.197) 269.579,224.197 269.579,222.2 ccw(c270.245,222.2) 270.245,221.535 271.403,221.535 ccw(c271.403,222.2) 272.068,222.2 272.068,224.197 cw(c272.454,224.197) 272.454,224.583 273.613,224.583 cw(c273.613,224.197) 273.999,224.197 273.999,222.2 ccw(c274.664,222.2) 274.664,221.535 275.822,221.535 ccw(c275.822,222.2) 276.488,222.2 276.488,224.197 cw(c276.874,224.197) 276.874,224.583 278.032,224.583 cw(c278.032,224.197) 278.418,224.197 278.418,222.2 ccw(c279.084,222.2) 279.084,221.535 280.242,221.535 ccw(c280.242,222.2) 280.907,222.2 280.907,224.197 cw(c281.294,224.197) 281.294,224.583 282.452,224.583 cw(c282.452,224.197) 282.838,224.197 282.838,222.2 ccw(c283.503,222.2) 283.503,221.535 284.662,221.535 ccw(c284.662,222.2) 285.327,222.2 285.327,224.197 cw(c285.713,224.197) 285.713,224.583 286.871,224.583 cw(c286.871,224.197) 287.257,224.197 287.257,222.2 ccw(c287.923,222.2) 287.923,221.535 289.081,221.535 ccw(c289.081,222.2) 289.747,222.2 289.747,224.068 cw(c290.133,224.068) 290.133,224.454 291.291,224.454 cw(c291.291,224.068) 291.677,224.068 291.677,223.414 ccw(c292.343,223.414) 292.343,222.748 296.886,222.748 346.069,222.748 349.076,219.742 352.17,219.742 352.26,219.653 352.26,219.527 351.385,218.652 J3.3@351.01,218.652
  Bottom Layer w0.152: v1(231.489,221.226) 231.506,221.243 D1E.6@231.506,221.867
EEM_IO.LVDS_N17: D1D.6 IC20D.5 J3.6 | length 178.3
  TopLayer w0.152: v1(237.102,228.633) 237.149,228.679 237.428,228.679 237.517,228.769 237.517,228.793 237.591,228.867 IC20D.5@237.866,228.867 IC20D.5@237.922,228.923
  Bottom Layer w0.152: D1D.6@237.106,229.192 237.102,229.188 v1(237.102,228.633) 237.036,228.566 236.931,228.566 236.656,228.291 236.656,228.165 236.819,228.003 241.497,228.003 245.876,232.382 248.628,232.382 248.843,232.382 ccw(c248.843,232.819) 249.28,232.819 249.28,233.19 cw(c249.997,233.19) 249.997,233.906 251.307,233.906 cw(c251.307,233.19) 252.024,233.19 252.024,231.295 ccw(c252.46,231.295) 252.46,230.858 253.771,230.858 ccw(c253.771,231.295) 254.208,231.295 254.208,233.19 cw(c254.924,233.19) 254.924,233.906 256.235,233.906 cw(c256.235,233.19) 256.951,233.19 256.951,231.295 ccw(c257.388,231.295) 257.388,230.858 258.699,230.858 ccw(c258.699,231.295) 259.136,231.295 259.136,233.19 cw(c259.852,233.19) 259.852,233.906 261.162,233.906 cw(c261.162,233.19) 261.879,233.19 261.879,231.295 ccw(c262.316,231.295) 262.316,230.858 263.626,230.858 ccw(c263.626,231.295) 264.063,231.295 264.063,233.19 cw(c264.779,233.19) 264.779,233.906 266.09,233.906 cw(c266.09,233.19) 266.806,233.19 266.806,231.295 ccw(c267.243,231.295) 267.243,230.858 268.554,230.858 ccw(c268.554,231.295) 268.991,231.295 268.991,233.19 cw(c269.707,233.19) 269.707,233.906 271.018,233.906 cw(c271.018,233.19) 271.734,233.19 271.734,231.295 ccw(c272.171,231.295) 272.171,230.858 273.481,230.858 ccw(c273.481,231.295) 273.918,231.295 273.918,233.19 cw(c274.635,233.19) 274.635,233.906 275.945,233.906 cw(c275.945,233.19) 276.662,233.19 276.662,231.295 ccw(c277.098,231.295) 277.098,230.858 278.409,230.858 ccw(c278.409,231.295) 278.846,231.295 278.846,233.19 cw(c279.562,233.19) 279.562,233.906 280.873,233.906 cw(c280.873,233.19) 281.589,233.19 281.589,231.295 ccw(c282.026,231.295) 282.026,230.858 283.337,230.858 ccw(c283.337,231.295) 283.774,231.295 283.774,233.19 cw(c284.49,233.19) 284.49,233.906 285.8,233.906 cw(c285.8,233.19) 286.517,233.19 286.517,231.295 ccw(c286.954,231.295) 286.954,230.858 288.264,230.858 ccw(c288.264,231.295) 288.701,231.295 288.701,233.19 cw(c289.417,233.19) 289.417,233.906 290.728,233.906 cw(c290.728,233.19) 291.444,233.19 291.444,231.295 ccw(c291.881,231.295) 291.881,230.858 293.192,230.858 ccw(c293.192,231.295) 293.629,231.295 293.629,232.982 cw(c294.345,232.982) 294.345,233.698 295.656,233.698 cw(c295.656,232.982) 296.372,232.982 296.372,231.666 ccw(c296.809,231.666) 296.809,231.229 298.119,231.229 ccw(c298.119,231.666) 298.556,231.666 cw(c299.273,231.666) 299.273,232.382 300.192,232.382 300.268,232.382 ccw(c300.268,232.667) 300.552,232.667 300.552,232.672 cw(c300.837,232.672) 300.837,232.957 301.69,232.957 cw(c301.69,232.672) 301.975,232.672 301.975,232.667 ccw(c302.259,232.667) 302.259,232.382 302.838,232.382 327.268,232.382 327.35,232.3 342.168,217.482 351.902,217.482 352.338,217.046 352.42,216.964 352.42,216.216 352.549,216.087 353.525,216.087 J3.6@353.55,216.112